# Altium PCB PCB1.PcbDoc
Units mm, origin at the board's own origin, x right, y up, seen from the top; angles counter-clockwise.
Board outline 129.67 x 121.92 mm, 2 copper layers (Top Layer, Bottom Layer); 42 components, 35 nets, 136 pads, 16 vias.
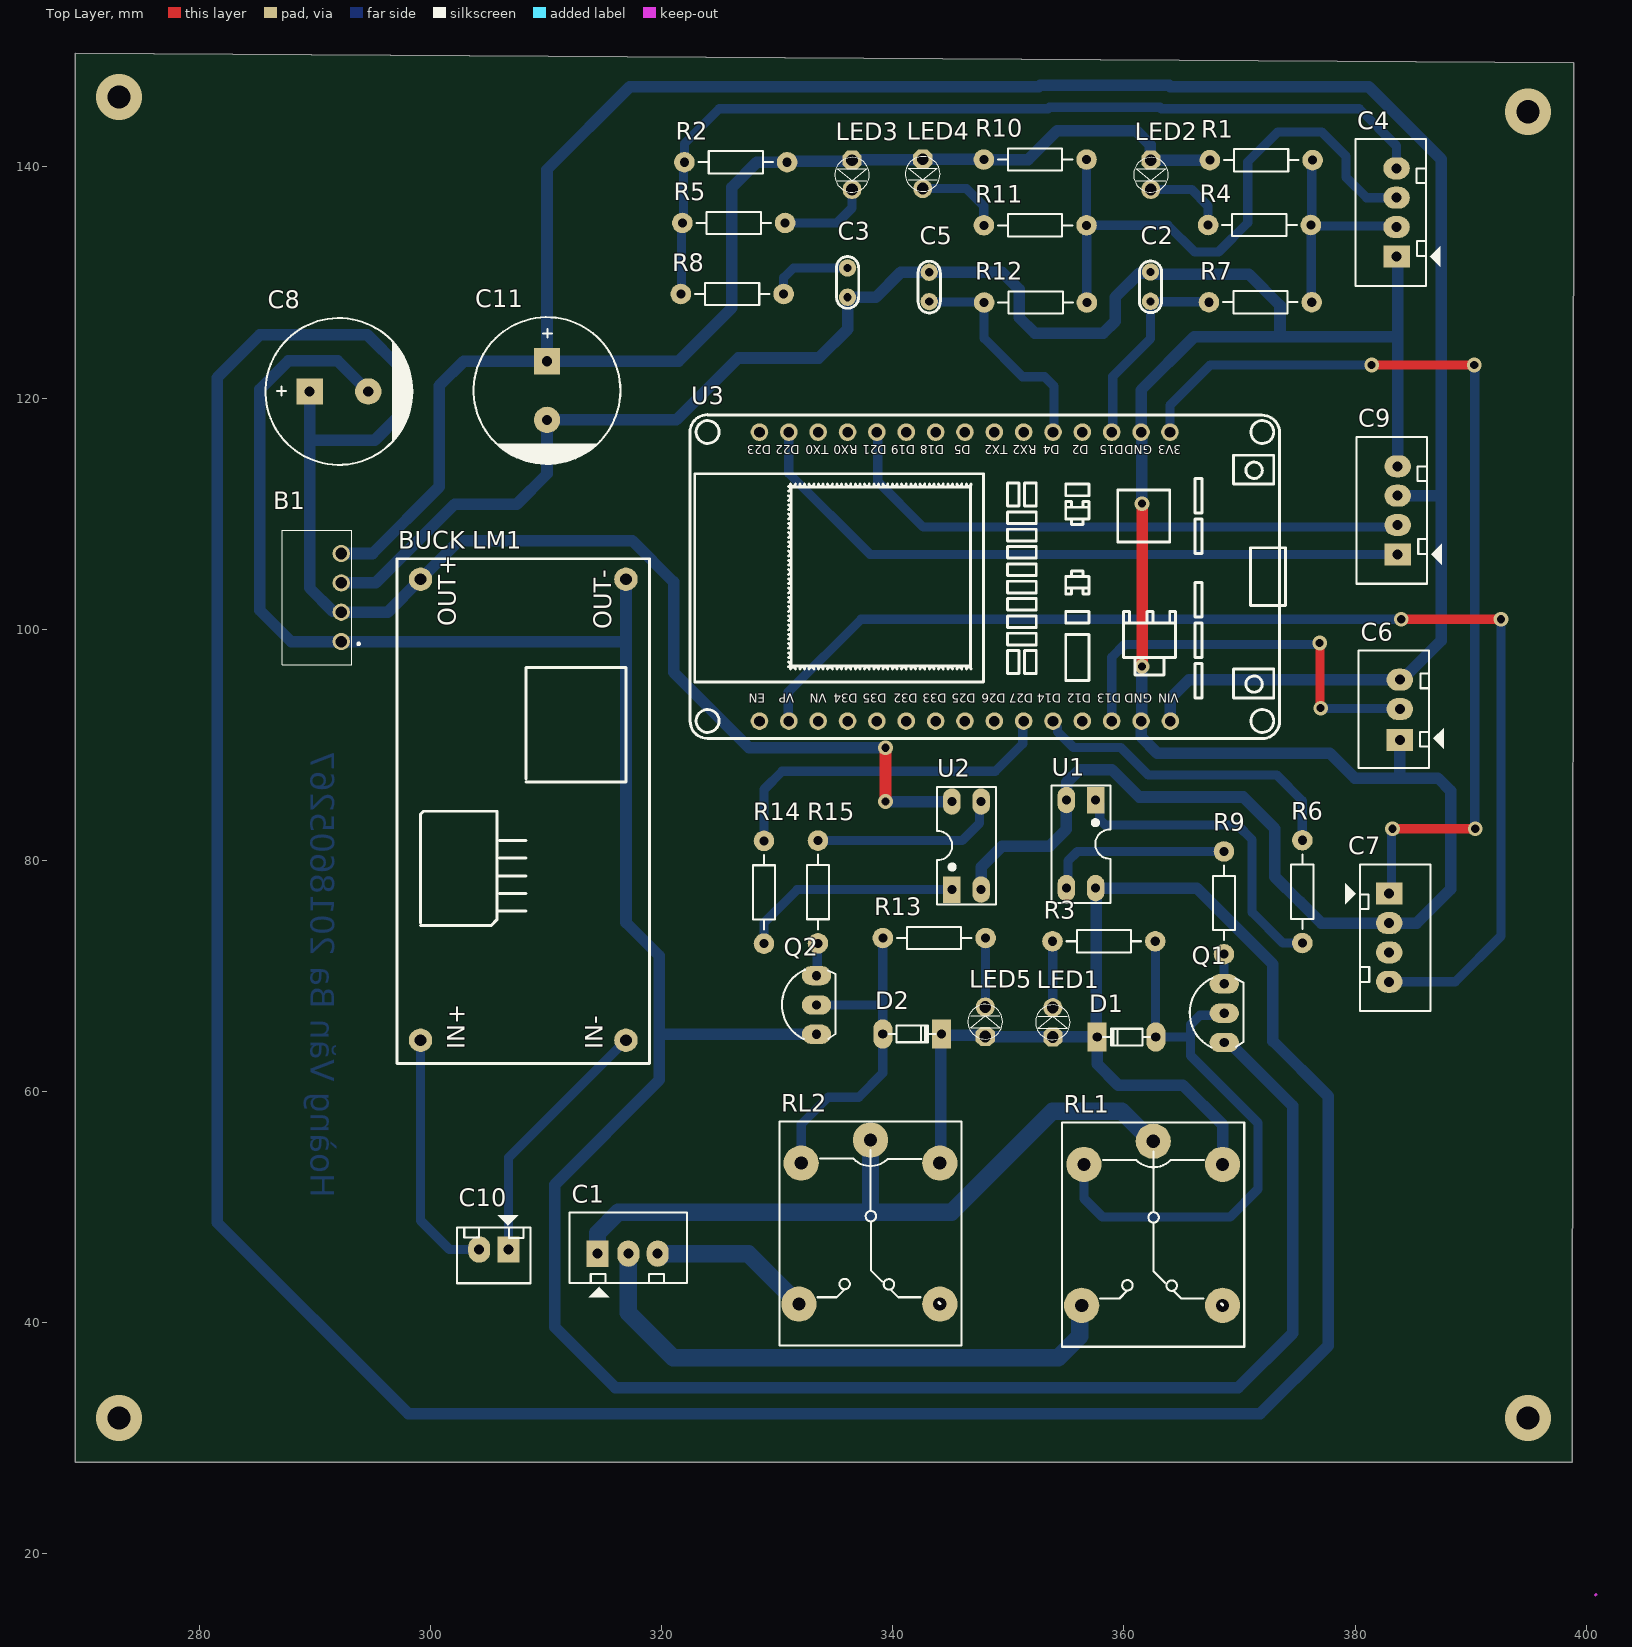
[diagram p0: Top Layer view]
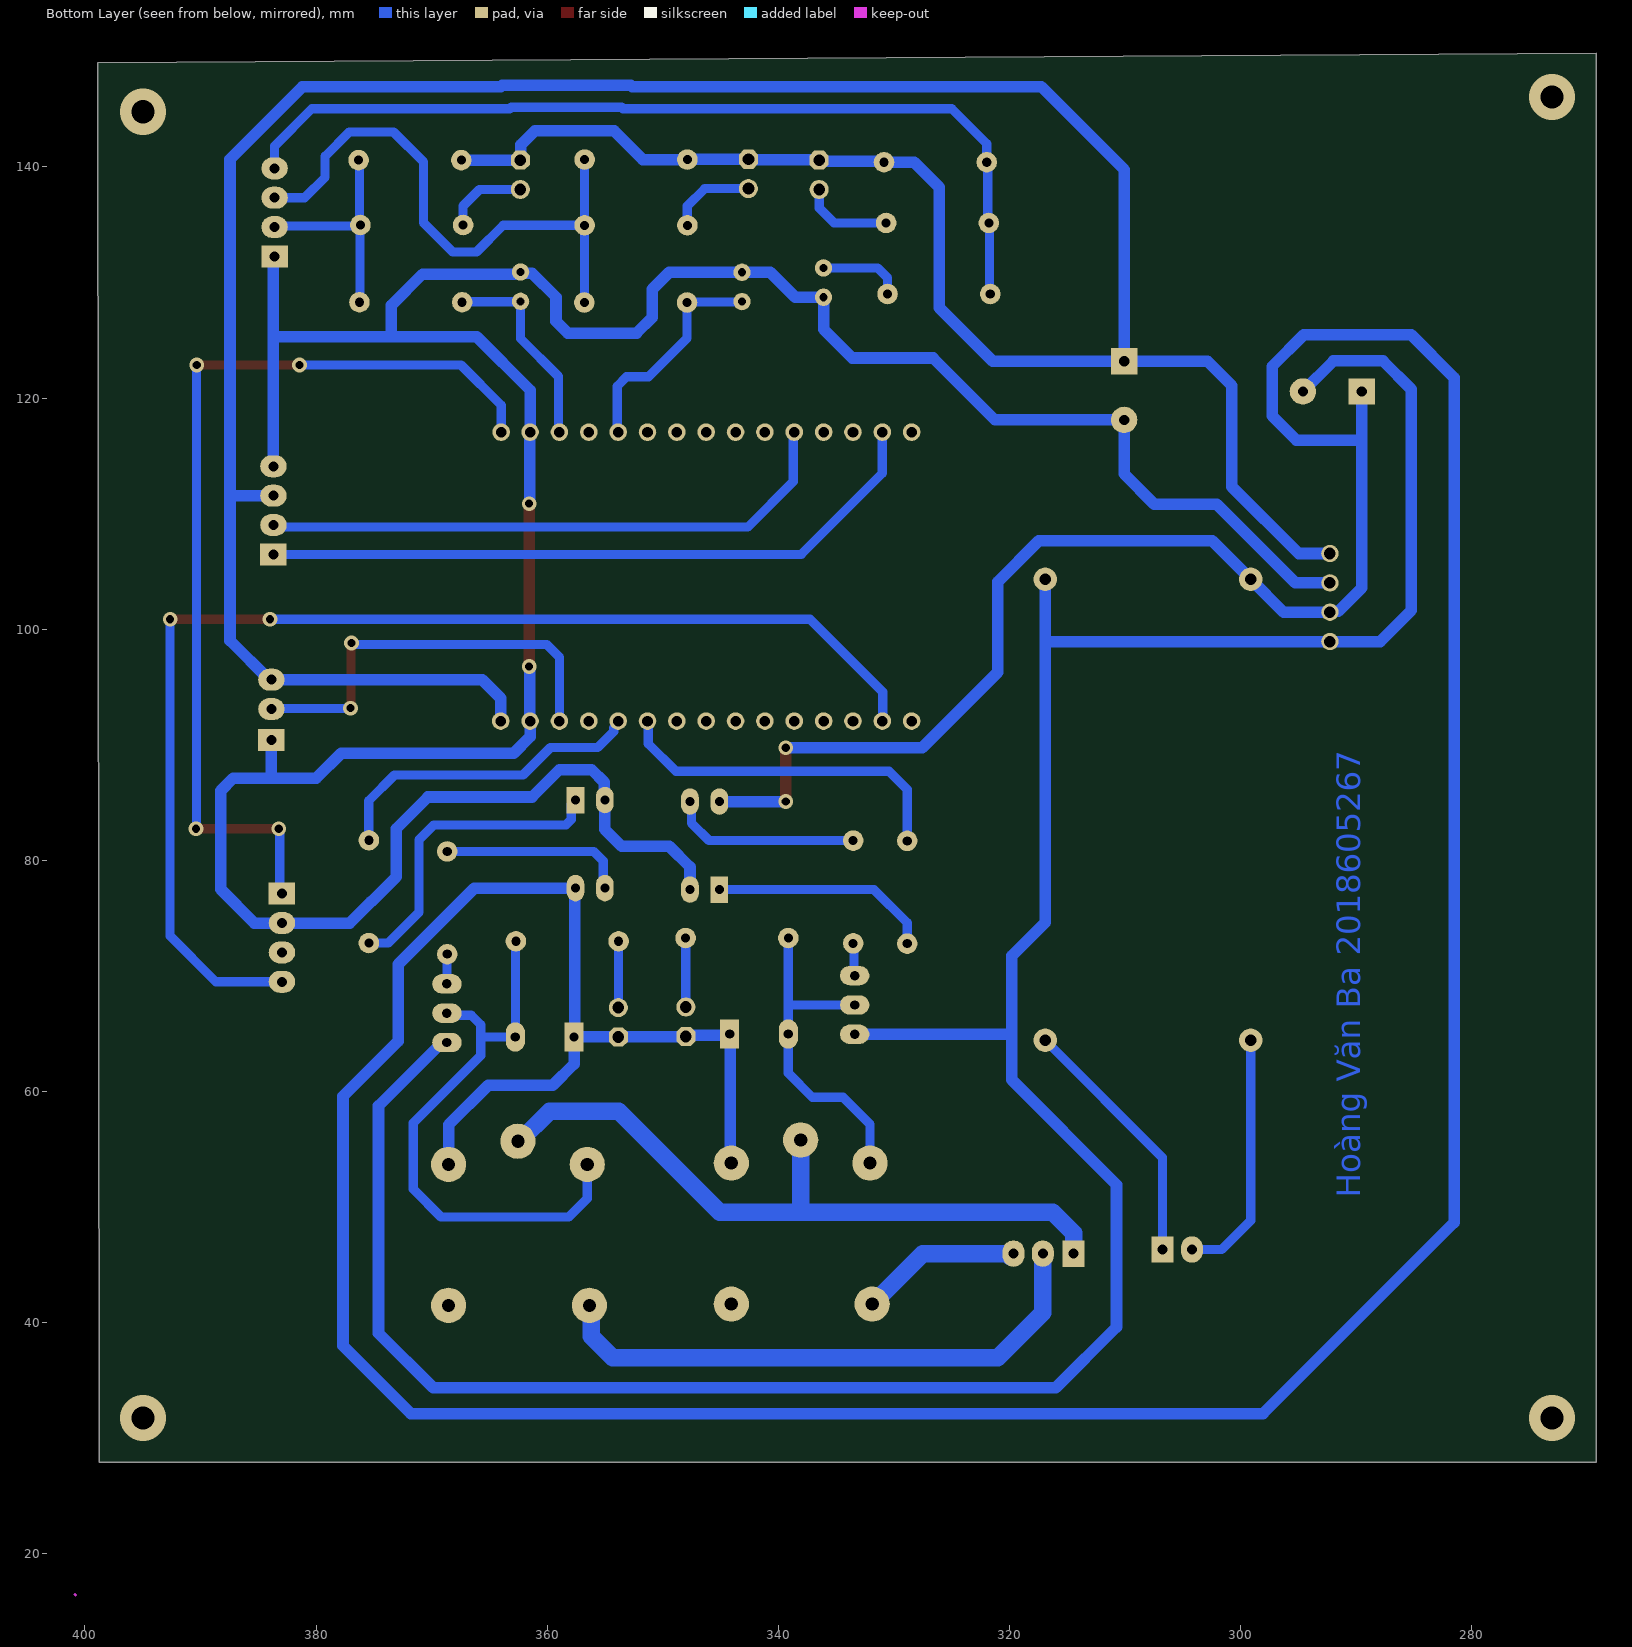
[diagram p1: Bottom Layer view, seen from below]
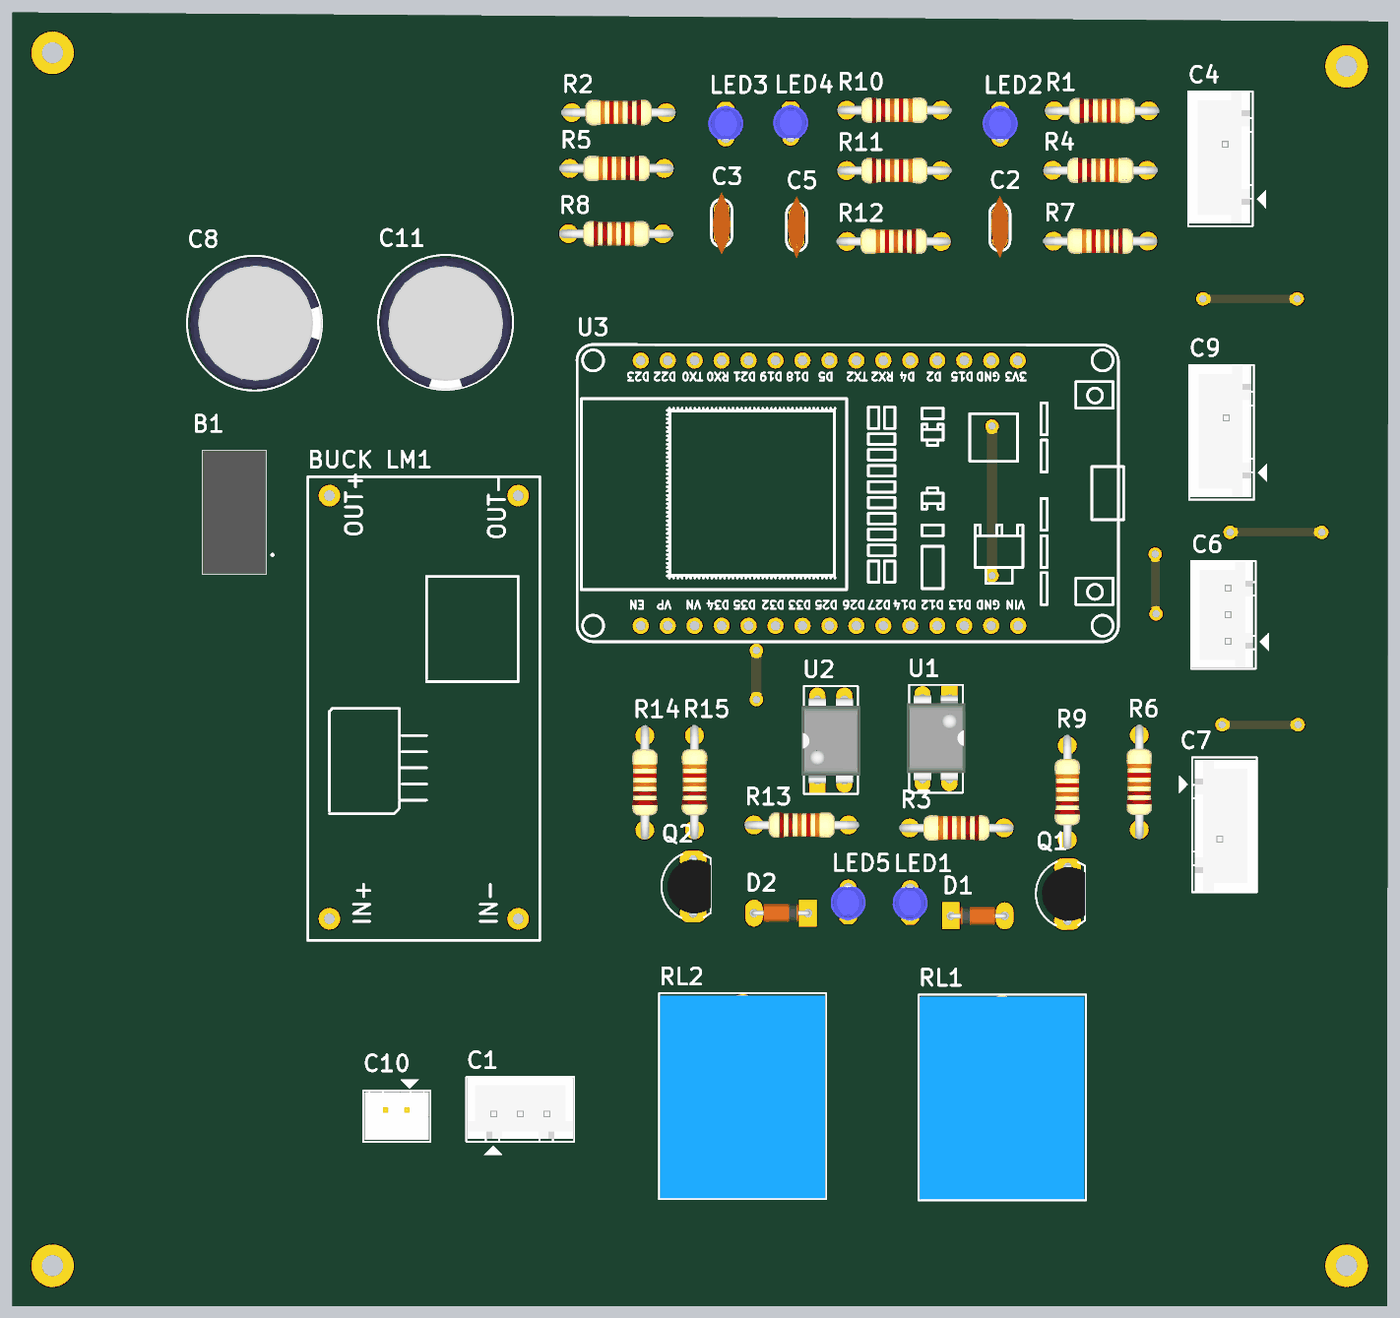
[diagram p2: 3D render of the assembled board from above, using the file's embedded part models]

## Layer stack, top to bottom
Top Solder: solder mask 0.0102, Solder Resist, Dk 3.5
Top Layer: signal copper 0.0356
Dielectric 1: dielectric 0.32, FR-4, Dk 4.8
Bottom Layer: signal copper 0.0356
Bottom Solder: solder mask 0.0102, Solder Resist, Dk 3.5

## Board outline
269.24,27.94 398.78,27.94 398.779,27.964 398.907,148.996 269.24,149.86

## Design rules (kind name [scope] priority, off if disabled: settings)
Clearance [All] p1: gap=1 ignorepadtopadclearanceinfootprint=FALSE
PolygonConnect [All] p1: connectstyle=Relief reliefconductorwidth=0.254 reliefentries=4 polygonreliefangle="90 Angle" airgapwidth=0.254
RoutingVias [All] p1: holewidth=0.711 width=1.27 viastyle="Through Hole" minholewidth=0.711 minwidth=1.27 maxholewidth=0.711 maxwidth=1.27
SolderMaskExpansion [All] p1: expansion=0.102 istentingtop=FALSE
Width GND_ISO [InNet('GND_ISO')] p1: maxlimit=1 minlimit=1 preferedwidth=1
Width COM_O_1 [InNet('COM_O_1')] p2: maxlimit=1.5 minlimit=1.5 preferedwidth=1.5
Width OUT_RL1 [InNet('OUT_RL1')] p3: maxlimit=1.5 minlimit=1.5 preferedwidth=1.5
Width OUT_RL2 [InNet('OUT_RL2')] p4: maxlimit=1.5 minlimit=1.5 preferedwidth=1.5
Width OUT_RL3 [InNet('OUT_RL3')] p5: maxlimit=1.5 minlimit=1.5 preferedwidth=1.5
Width VCC_ISO [InNet('VCC5_ISO')] p6: maxlimit=1 minlimit=1 preferedwidth=1
Width GND [InNet('GND')] p7: maxlimit=1 minlimit=1 preferedwidth=1
Width VCC [InNet('VCC5')] p8: maxlimit=1 minlimit=1 preferedwidth=1
Width SIGNAL [All] p9: maxlimit=0.8 minlimit=0.8 preferedwidth=0.8
30 further rules are at their usual default settings.

## Components (designator, comment, footprint, x,y, rotation, side; value= is the part's Value field where it differs from the comment)
B1 "B0505S1W" B0505S1W 292.278,98.933 r90 top
"BUCK LM1" "Buck LM2596" "BUCK LM2596" 307.264,83.998 r90 top
C1 "Header3" Header3 314.579,45.974 r0 top
C2 "104" "tu gom" 362.306,129.642 r90 top
C3 "104" "tu gom" 336.093,129.997 r270 top
C4 "Header4" Header4 383.591,132.258 r90 top
C5 "104" "tu gom" 343.154,129.616 r90 top
C6 "1_WIRE_2" Header3 383.87,90.551 r90 top
C7 "SS_HUMI" Header4 382.956,77.114 r270 top
C8 "Cap Pol3" CP2/5 289.535,120.574 r0 top value=C?
C9 "LCD_I2C" Header4 383.692,106.477 r90 top
C10 "Header2" Header2 306.756,46.33 r180 top
C11 "Cap Pol3" CP2/5 310.083,123.19 r270 top value=C?
D1 "100v" "DIODE 0.5A" 360.223,64.719 r0 top
D2 "100v" "DIODE 0.5A" 341.681,64.973 r180 top
LED1 "LED 3mm" LED-3MM-BLUE 353.847,66.116 r90 top
LED2 "LED 3mm" LED-3MM-BLUE 362.331,139.192 r270 top
LED3 "LED 3mm" LED-3MM-BLUE 336.474,139.192 r270 top
LED4 "LED 3mm" LED-3MM-BLUE 342.595,139.268 r270 top
LED5 "LED 3mm" LED-3MM-BLUE 348.005,66.167 r90 top
Q1 "C1815" C1815_cam 368.681,66.777 r90 top
Q2 "C1815" C1815_cam 333.4,67.488 r90 top
R1 "10K" R1/4W 376.326,140.589 r180 top value="R1/4W - 1K"
R2 "10K" R1/4W 321.97,140.411 r0 top value="R1/4W - 1K"
R3 "390R" R1/4W 353.822,73 r0 top value="R1/4W - 1K"
R4 "220R" R1/4W 376.174,134.976 r180 top value="R1/4W - 1K"
R5 "220R" R1/4W 321.793,135.153 r0 top value="R1/4W - 1K"
R6 "220R" R1/4W 375.437,81.737 r270 top value="R1/4W - 1K"
R7 "1K" R1/4W 367.36,128.295 r0 top value="R1/4W - 1K"
R8 "1K" R1/4W 330.556,129.007 r180 top value="R1/4W - 1K"
R9 "560R" R1/4W 368.656,80.772 r270 top value="R1/4W - 1K"
R10 "10K" R1/4W 356.768,140.64 r180 top value="R1/4W - 1K"
R11 "220R" R1/4W 356.768,134.95 r180 top value="R1/4W - 1K"
R12 "1K" R1/4W 347.904,128.27 r0 top value="R1/4W - 1K"
R13 "510R" R1/4W 348.031,73.279 r180 top value="R1/4W - 1K"
R14 "100R" R1/4W 328.854,81.686 r270 top value="R1/4W - 1K"
R15 "510R" R1/4W 333.527,81.712 r270 top value="R1/4W - 1K"
RL1 "Relay" RELAY_SRA_05VDC_SL_C 362.54,55.696 r270 top
RL2 "Relay" RELAY_SRA_05VDC_SL_C 338.074,55.804 r270 top
U1 "PC817" DIP4/W0.3 357.556,85.217 r180 top
U2 "PC817" DIP4/W0.3 345.11,77.47 r0 top
U3 "ESP32_MODULE copy" ESP32-WIFIMODULE-FOOTPRINT 347.98,106.68 r90 top

## Footprints (in the part's own frame and the unit in brackets; to place one, negate y for a bottom-side part, rotate by r counter-clockwise, add the part's x,y. Pads: shape width x height; smd on the part's side, far side on the other; paste and mask are expansions set on the pad)
B0505S1W [mm]
  round 1.5 hole 1: 1(0,0) 2(2.54,0) 3(5.08,0) 4(7.62,0)
  silkscreen extent -1.99,-1.6 9.61,5.1, body extent -1.99,-0.9 9.61,5.1, height 10.1
"BUCK LM2596" [mil]
  round 80 hole 40: 1(-770,320) 2(-770,-380) 3(800,-380) 4(800,320)
  silkscreen extent -850,-460 870,400
C1815_cam [mil]
  oval 66x100 hole 32: 1(-100,0) 2(0,0) 3(100,0)
  silkscreen extent -117,-65 120,118, body extent -109,-66 109,95, height 245
CP2/5 [mil]
  rect 90x90 hole 35: 1(0,0)
  round 90 hole 35: 2(200,0)
  silkscreen extent -150,-250 350,250, body extent -142,-246 350,246, height 984
"DIODE 0.5A" [mil] "Diode muoi, xung"
  oval 65x100 hole 32: 1(100,0)
  rect 65x100 hole 32: 2(-100,0)
  silkscreen extent -80,-30 80,28, body extent -108,-33 108,32, height 61
DIP4/W0.3 [mil]
  rect 60x90 hole 31: 1(0,0)
  oval 60x90 hole 31: 2(100,0) 3(100,300) 4(0,300)
  silkscreen extent -50,-50 150,350, body extent -59,-10 159,305, height 170
ESP32-WIFIMODULE-FOOTPRINT [mil]
  round 60 hole 36: 1(-575.9,768.25) 2(-575.9,668.25) 3(-575.9,568.25) 4(-575.9,468.25) 5(-575.9,368.25) 6(-575.9,268.25) 7(-575.9,168.25) 8(-575.9,68.25) 9(-575.9,-31.75) 10(-575.9,-131.75) 11(-575.9,-231.75) 12(-575.9,-331.75) 13(-575.9,-431.75) 14(-575.9,-531.75) 15(-575.9,-631.75) 16(408.35,-630.18) 17(408.35,-531.75) 18(408.35,-431.75) 19(408.35,-331.75) 20(408.35,-231.75) 21(408.35,-131.75) 22(408.35,-31.75) 23(408.35,68.25) 24(408.35,168.25) 25(408.35,268.25) 26(408.35,368.25) 27(408.35,468.25) 28(408.35,568.25) 29(408.35,668.25) 30(408.35,768.25)
  silkscreen extent -635,-1023 468,1005
Header2 [mil] "CON2"
  rect 75x90 hole 34: 1(0,0)
  oval 75x90 hole 34: 2(100,0)
  silkscreen extent -75,-118 175,115, body extent -68,-70 168,107, height 236
Header3 [mil] "CON 3"
  rect 75x90 hole 34: 1(-5,0)
  oval 75x90 hole 34: 2(100,0) 3(200,0)
  silkscreen extent -100,-150 300,140, body extent -95,-90 295,136, height 276
Header4 [mil] "CON4"
  rect 75x90 hole 34: 1(0,0)
  oval 75x90 hole 34: 2(100,0) 3(200,0) 4(300,0)
  silkscreen extent -100,-150 400,140, body extent -90,-90 398,136, height 276
LED-3MM-BLUE [mil]
  oct 65x65 hole 40: 1(-55,0)
  round 65 hole 40: 2(45,0)
  silkscreen extent -64,-59 54,59, body extent -72,-65 54,65, height 184
R1/4W [mil]
  round 70 hole 31: 1(0,0) 2(350,0)
  silkscreen extent 48,-38 302,38, body extent -40,-47 386,47, height 111
RELAY_SRA_05VDC_SL_C [mil] "Relay SPDT, 5 pin, 10A,W 650mil, L 800mil, H 800mil"
  round 120 hole 45: 1(559.06,-243.78) 2(559.06,236.22) 3(78.74,236.22) 4(0,0) 5(78.74,-236.22)
  silkscreen extent -63,-311 700,310, body extent -55,-306 697,304, height 602
"tu gom" [mm] "Tu gom mini"
  round 1.5 hole 0.7: 1(-1.27,0) 2(1.27,0)
  silkscreen extent -2.25,-0.97 2.22,0.97, body extent -2.92,-0.85 2.92,0.85, height 6.12

## Part data
B1: "Power Supply", Manufacturer_Name=Mornsun, Manufacturer_Part_Number=B0505S-1W, Datasheet Link=https://www.mornsun-power.com/uploads/pdf/B_D-1W.pdf, Height=10.41mm
C1: "Header IDC, 3 x 1 Pin Vertical 2.54mm Pitch (Non-Boxed, Male)", Manufacturer="W¨¹rth Elektronik eiSos GmbH", partNo=613002143121, ComponentLink1 Description=Manufacturer, ComponentLink1URL=http://www.we-online.com, ComponentLink2 Description=Datasheet, ComponentLink2URL=http://katalog.we-online.de/em/datasheet/6130xx143121.pdf, Created by="Karrer Zheng", Created Date="29 March 2013", NoPins=02
C2 C3 C5: library part "Tu gom 104 50V", "Cắm", Chung_Loai=Cắm, Don_Vi=Con, Ma_Hang=MH004761, So_Chan=2, Ten_Linh_Kien="Tụ gốm 104 100nF 50V"
C4: "Header IDC, 4 x 1 Pin Vertical 2.54mm Pitch (Non-Boxed, Male)", Manufacturer="W¨¹rth Elektronik eiSos GmbH", partNo=613002143121, ComponentLink1 Description=Manufacturer, ComponentLink1URL=http://www.we-online.com, ComponentLink2 Description=Datasheet, ComponentLink2URL=http://katalog.we-online.de/em/datasheet/6130xx143121.pdf, Created by="Karrer Zheng", Created Date="29 March 2013", NoPins=02
C6: library part Header3, "Header IDC, 3 x 1 Pin Vertical 2.54mm Pitch (Non-Boxed, Male)", Manufacturer="W¨¹rth Elektronik eiSos GmbH", partNo=613002143121, ComponentLink1 Description=Manufacturer, ComponentLink1URL=http://www.we-online.com, ComponentLink2 Description=Datasheet, ComponentLink2URL=http://katalog.we-online.de/em/datasheet/6130xx143121.pdf, Created by="Karrer Zheng", Created Date="29 March 2013", NoPins=02
C7 C9: library part Header4, "Header IDC, 4 x 1 Pin Vertical 2.54mm Pitch (Non-Boxed, Male)", Manufacturer="W¨¹rth Elektronik eiSos GmbH", partNo=613002143121, ComponentLink1 Description=Manufacturer, ComponentLink1URL=http://www.we-online.com, ComponentLink2 Description=Datasheet, ComponentLink2URL=http://katalog.we-online.de/em/datasheet/6130xx143121.pdf, Created by="Karrer Zheng", Created Date="29 March 2013", NoPins=02
C8 C11: "Polarized Capacitor (Surface Mount)", LatestRevisionDate=17-Jul-2002, LatestRevisionNote="Re-released for DXP Platform.", PackageReference=C0805, Publisher="Altium Limited"
C10: "Header IDC, 2 x 1 Pin Vertical 2.54mm Pitch (Non-Boxed, Male)", Manufacturer="W¨¹rth Elektronik eiSos GmbH", partNo=613002143121, ComponentLink1 Description=Manufacturer, ComponentLink1URL=http://www.we-online.com, ComponentLink2 Description=Datasheet, ComponentLink2URL=http://katalog.we-online.de/em/datasheet/6130xx143121.pdf, Created by="Karrer Zheng", Created Date="29 March 2013", NoPins=02
D1 D2: library part "Diode 1N4148", "Cắm", Chung_Loai=Cắm, Don_Vi=Con, Ma_Hang=MH001065, Ten_Linh_Kien="Diode 1N4148 DO35 450mA 100V ( 1N4148 DIP)"
LED1 LED2 LED3 LED4 LED5: library part "LED 3mm Xanh Duong", "Cắm", Chung_Loai=Cắm, Don_Vi=Con, Ma_Hang=MH009003, Ten_Linh_Kien="LED 3MM Xanh Dương SS (1000c)"
Q1 Q2: "NPN 600mW, ECB"
R1 R2 R3 R4 R5 R6 R7 R8 R9 R10 R11 R12 R13 R14 R15: library part R1/4W, "Resistor 1/4W"
RL1 RL2: library part RL_SRA-05VDC-SL-C, "Relay 5 Chan", Ma_Hang=MH009374, Ten="Relay 5V10A SRD-05VDC-SL-C Chính Hãng"
U1 U2: "Single Opto"

## Via types
v1: diameter 1.27, hole 0.711, Top Layer to Bottom Layer, 12 vias
v2: diameter 4, hole 2, Top Layer to Bottom Layer, 4 vias

## Nets (pads, with @x,y where several pads share a name; then routed paths per layer and width w, separated by ;. In a path a pad name is that pad's centre, name@x,y a point inside that pad or via, vN(x,y) a via of type N, cw(c..) or ccw(c..) an arc to the next point about the centre after c; other vN are vias at no path point)
1_WIRE_1: C6.2 U3.13 | length 36.6
  Top Layer w0.8: v1(376.936,98.806) 376.977,98.765 376.977,93.215 v1(377.019,93.174)
  Bottom Layer w0.8: U3.13 358.946,97.58 360.045,98.679 376.477,98.679 376.514,98.716 376.846,98.716 v1(376.936,98.806) ; v1(377.019,93.174) 377.06,93.132 383.829,93.132 C6.2
COM_O_1: C1.1 RL1.4 RL2.4 | length 61.6
  Bottom Layer w1.5: C1.1 314.452,47.752 316.255,49.555 338.074,49.555 ; RL2.4 338.074,49.555 ; RL1.4 362.397,55.696 359.8,58.293 353.822,58.293 345.084,49.555 338.074,49.555
GND: "BUCK LM1.3" B1.1 C8.2 Q1.1 Q2.1 | length 242.6
  Bottom Layer w1: C8.2 291.972,123.217 287.682,123.217 285.242,120.777 285.242,101.625 287.934,98.933 B1.1 316.89,98.933 316.916,98.908 ; 316.916,104.318 316.916,98.908 ; Q2.1 320.04,64.948 319.811,64.719 ; Q1.1 369.113,64.237 374.599,58.75 374.599,39.091 369.875,34.366 316.001,34.366 310.744,39.624 310.744,51.943 319.811,61.011 319.811,64.719 ; 316.916,98.908 316.916,74.625 319.811,71.73 319.811,64.719
GND_ISO: B1.3 C2.2 C3.2 C4.1 C5.2 C6.1 C7.2 C9.4 C11.2 U1.2 U2.2 U3.14 U3.17 | length 278.3
  Top Layer w1: v1(361.569,96.774) v1(361.569,110.871)
  Bottom Layer w1: B1.3 295.273,104.013 302.08,110.82 307.467,110.82 310.083,113.436 C11.2 321.259,118.11 326.619,123.469 333.604,123.469 336.093,125.959 C3.2 338.544,128.727 340.703,130.886 C5.2 349.453,130.886 350.926,129.413 350.926,126.975 352.273,125.628 358.216,125.628 359.245,126.657 359.245,128.74 361.321,130.816 362.21,130.816 C2.2 362.401,130.816 362.755,130.816 362.837,130.734 370.789,130.734 373.507,128.016 373.507,125.298 ; U2.2 347.65,79.426 349.453,81.229 353.568,81.229 355.016,82.677 U1.2 355.016,85.789 355.067,85.84 355.067,86.754 356.172,87.86 358.939,87.86 361.318,85.481 370.322,85.481 373.048,82.755 373.048,78.589 375.233,76.404 375.259,76.404 377.089,74.574 C7.2 385.349,74.574 388.264,77.49 388.264,86.03 387.172,87.122 384.048,87.122 ; v1(361.569,96.774) 361.528,96.733 361.528,92.093 U3.14 361.486,90.687 362.892,89.281 377.825,89.281 379.984,87.122 384.048,87.122 ; v1(361.569,110.871) 361.528,110.912 361.528,117.011 U3.17 361.486,120.694 366.09,125.298 373.507,125.298 ; C4.1 383.692,132.156 383.692,125.171 ; C9.4 383.692,125.171 ; C6.1 383.87,87.3 384.048,87.122 ; 373.507,125.298 383.565,125.298 383.692,125.171
IN_1: C2.1 R7.1 U3.18 | length 17.8
  Bottom Layer w0.8: U3.18 359.029,117.135 359.029,121.869 362.306,125.146 C2.1 362.344,128.333 367.322,128.333 R7.1
IN_2: C5.1 R12.1 U3.20 | length 19.7
  Bottom Layer w0.8: C5.1 343.192,128.308 347.866,128.308 R12.1 347.904,125.171 351.231,121.844 353.136,121.844 353.949,121.031 353.949,117.135 U3.20
IN_3: C3.1 R8.1 | length 7.3
  Bottom Layer w0.8: R8.1 330.556,130.404 331.419,131.267 C3.1
"NetBUCK LM1_2": "BUCK LM1.2" C10.1 | length 22.3
  Bottom Layer w0.8: C10.1 306.756,54.28 316.916,64.44
NetD1_1: D1.1 Q1.2 R3.2 RL1.5 | length 51
  Bottom Layer w0.8: RL1.5 356.54,50.749 358.14,49.149 369.189,49.149 371.602,51.562 371.602,57.277 365.76,63.119 365.76,64.77 ; R3.2 362.737,72.974 362.737,64.745 D1.1 365.709,64.719 365.76,64.77 ; Q1.2 368.513,66.609 366.583,66.609 365.76,65.786 365.76,64.77
NetD2_1: D2.1 Q2.2 R13.2 RL2.5 | length 29.7
  Bottom Layer w0.8: RL2.5 332.074,57.17 334.416,59.512 337.058,59.512 339.141,61.595 D2.1 339.141,67.386 ; Q2.2 339.039,67.488 339.141,67.386 ; R13.2 339.141,67.386
NetLED1_2: LED1.2 R3.1 | length 5.8
  Bottom Layer w0.8: R3.1 353.835,72.987 353.835,67.272 LED1.2
NetLED2_2: LED2.2 R4.2 | length 7.2
  Bottom Layer w0.8: LED2.2 365.862,138.049 367.284,136.627 R4.2
NetLED3_2: LED3.2 R5.2 | length 7.9
  Bottom Layer w0.8: R5.2 335.178,135.153 336.474,136.449 LED3.2
NetLED4_2: LED4.2 R11.2 | length 7.6
  Bottom Layer w0.8: LED4.2 346.38,138.125 347.878,136.627 R11.2
NetLED5_2: LED5.2 R13.1 | length 6
  Bottom Layer w0.8: LED5.2 348.018,67.323 348.018,73.266 R13.1
NetQ1_3: Q1.3 R9.2 | length 2.6
  Bottom Layer w0.8: R9.2 368.668,71.869 368.668,69.329 Q1.3
NetQ2_3: Q2.3 R15.2 | length 2.8
  Bottom Layer w0.8: Q2.3 333.464,70.091 333.464,72.758 R15.2
NetR6_2: R6.2 U1.1 | length 27.5
  Bottom Layer w0.8: U1.1 357.918,84.855 357.918,83.53 358.386,83.061 369.821,83.061 371.094,81.788 371.094,75.509 373.756,72.847 R6.2
NetR9_1: R9.1 U1.3 | length 16.2
  Bottom Layer w0.8: U1.3 355.154,77.736 355.154,79.945 355.981,80.772 R9.1
NetR14_2: R14.2 U2.1 | length 19.2
  Bottom Layer w0.8: R14.2 328.854,74.6 331.724,77.47 U2.1
NetR15_1: R15.1 U2.3 | length 16.5
  Bottom Layer w0.8: R15.1 345.999,81.712 347.511,83.224 347.511,84.951 U2.3
OUT_1: R6.1 U3.11 | length 28.2
  Bottom Layer w0.8: U3.11 353.866,91.856 354.244,91.478 354.244,91.156 355.641,89.76 359.726,89.76 362.105,87.381 373.223,87.381 375.437,85.166 R6.1
OUT_2: R14.1 U3.10 | length 30.5
  Bottom Layer w0.8: R14.1 328.854,86.131 330.426,87.703 348.866,87.703 351.253,90.09 351.253,91.978 U3.10
OUT_BTN_1: C4.2 R1.1 R4.1 R7.2 | length 19.8
  Bottom Layer w0.8: R7.2 376.212,128.333 R4.1@376.212,134.938 ; R1.1 376.25,140.513 376.25,135.052 R4.1 R4.1@376.212,134.938 ; C4.2 383.502,134.887 376.263,134.887 R4.1@376.212,134.938
OUT_BTN_2: C4.3 R10.1 R11.1 R12.2 | length 51
  Bottom Layer w0.8: R10.1 R11.1 ; R12.2 356.781,128.283 356.781,134.938 R11.1 ; C4.3 381,137.338 379.222,139.116 379.222,140.931 377.125,143.027 373.304,143.027 370.713,140.437 370.713,135.167 368.179,132.634 366.121,132.634 363.804,134.95 R11.1
OUT_BTN_3: C4.4 R2.1 R5.1 R8.2 | length 79.4
  Bottom Layer w0.8: R8.2 321.729,129.07 321.729,135.09 R5.1 321.881,135.242 321.881,140.322 R2.1 321.97,142.011 324.993,145.034 353.436,145.034 353.558,145.156 363.118,145.156 363.24,145.034 380.365,145.034 383.591,141.808 C4.4
OUT_RL1: C1.2 RL1.1 | length 49.3
  Bottom Layer w1.5: C1.2 317.119,40.843 321.005,36.957 354.33,36.957 356.186,38.813 356.186,41.333 RL1.1
OUT_RL2: C1.3 RL2.1 | length 14.5
  Bottom Layer w1.5: C1.3@319.927,45.706 319.846,45.706 319.659,45.893 C1.3 327.512,45.974 RL2.1
SCL: C9.1 U3.29 | length 59.2
  Bottom Layer w0.8: U3.29 331.006,113.494 338.023,106.477 C9.1
SDA: C9.2 U3.26 | length 51
  Bottom Layer w0.8: U3.26 338.709,116.97 338.709,112.776 342.649,108.836 383.512,108.836 C9.2
SS_HUMI: C7.4 U3.2 | length 105.5
  Top Layer w0.8: v1(383.997,100.863) v1(392.633,100.863)
  Bottom Layer w0.8: U3.2 330.962,92.097 330.962,94.564 337.261,100.863 v1(383.997,100.863) ; C7.4 388.671,69.494 392.633,73.457 v1(392.633,100.863)
VCC5: "BUCK LM1.4" B1.2 C8.1 D1.2 D2.2 LED1.1 LED5.1 RL1.3 RL2.3 U1.4 U2.4 | length 412.1
  Top Layer w1: v1(339.369,85.09) v1(339.369,89.738)
  Bottom Layer w1: C8.1 289.535,116.357 ; v1(339.369,85.09) U2.4 ; v1(339.369,89.738) 327.558,89.738 321.031,96.266 321.031,104.089 317.475,107.645 302.463,107.645 299.136,104.318 296.291,101.473 B1.2 292.182,101.569 291.54,101.569 289.535,103.574 289.535,116.357 ; RL2.3 344.147,53.877 344.147,64.9 D2.2 344.322,64.872 347.904,64.872 LED5.1 348.031,64.745 353.822,64.745 LED1.1 D1.2 ; RL1.3 368.54,57.113 365.11,60.543 359.522,60.543 357.683,62.382 D1.2 ; 289.535,116.357 295.173,116.357 297.282,118.466 297.282,122.733 294.538,125.476 285.242,125.476 281.534,121.768 281.534,48.666 298.069,32.131 371.805,32.131 377.673,37.998 377.673,59.588 372.897,64.364 372.897,71.019 366.319,77.597 U1.4 357.619,77.534 357.619,64.783 D1.2
VCC5_ISO: B1.4 C6.3 C9.3 C11.1 LED2.1 LED3.1 LED4.1 R1.2 R2.2 R10.2 U3.15 | length 275.7
  Bottom Layer w1: B1.4 294.984,106.553 300.761,112.33 300.761,121.082 302.87,123.19 C11.1 ; U3.15 364.026,94.024 365.633,95.631 C6.3 ; R1.2 LED2.1 362.286,140.634 362.286,141.904 361.061,143.129 354.218,143.129 351.729,140.64 R10.2 347.866,140.653 342.608,140.653 LED4.1 342.557,140.627 336.512,140.627 LED3.1 336.385,140.5 330.949,140.5 R2.2 328.244,140.411 326.085,138.252 326.085,127.813 321.462,123.19 C11.1 ; C9.3 387.426,111.557 387.452,111.582 ; C6.3@384.061,95.631 387.452,99.022 387.452,111.582 ; C11.1 310.083,139.776 317.241,146.934 352.649,146.934 352.771,147.056 363.905,147.056 364.027,146.934 381.181,146.934 387.452,140.664 387.452,111.582
VCC12: "BUCK LM1.1" C10.2 | length 21.7
  Bottom Layer w0.8: 299.136,64.44 299.136,48.844 301.65,46.33 C10.2
VCC33_ISO: C7.1 U3.16 | length 83.2
  Top Layer w0.8: v1(381.432,122.86) v1(390.322,122.86) ; v1(383.235,82.728) v1(390.399,82.728)
  Bottom Layer w0.8: U3.16 363.987,119.385 367.462,122.86 v1(381.432,122.86) ; C7.1 383.145,77.304 383.145,82.638 v1(383.235,82.728) ; v1(390.322,122.86) 390.361,122.821 390.361,82.767 v1(390.399,82.728) v1@390.399,82.65
pads on no net: C7.3 RL1.2 RL2.2 U3.1 U3.3 U3.4 U3.5 U3.6 U3.7 U3.8 U3.9 U3.12 U3.19 U3.21 U3.22 U3.23 U3.24 U3.25 U3.27 U3.28 U3.30
copper on no net: | length 0.2
  Top Layer w0.8: 356.406,92.052 356.47,92.116
  Bottom Layer w0.8: 356.406,92.052 356.457,92.103
  other v2: 273.05,31.75 394.97,31.75 394.97,144.78 273.05,146.05

## Keep-outs
Keep-Out Layer:
  lines w0.254: 400.812,16.434 400.863,16.485

## Other copper
Bottom Layer:
  text "Hoàng Văn Ba 2018605267" at 288.951,50.8 h3.5 r270

## Text inside footprints (layer, text, board x,y; h text height)
"BUCK LM1": Top Overlay "IN+" at 302.946,63.678 h1.52 r90; Top Overlay "IN-" at 314.884,63.678 h1.52 r90; Top Overlay "OUT+" at 302.184,100.254 h1.52 r90; Top Overlay "OUT-" at 315.646,100 h1.52 r90
U3: Top Overlay "D23" at 329.466,115.927 h0.75 r180; Top Overlay "D22" at 331.967,115.927 h0.75 r180; Top Overlay "TX0" at 334.466,115.927 h0.75 r180; Top Overlay "RX0" at 336.967,115.927 h0.75 r180; Top Overlay "D21" at 339.466,115.927 h0.75 r180; Top Overlay "D19" at 341.967,115.927 h0.75 r180; Top Overlay "D18" at 344.467,115.927 h0.75 r180; Top Overlay "D5" at 346.767,115.927 h0.75 r180; Top Overlay "TX2" at 349.966,115.927 h0.75 r180; Top Overlay "RX2" at 352.467,115.927 h0.75 r180; Top Overlay "D4" at 354.467,115.927 h0.75 r180; Top Overlay "D2" at 356.966,115.927 h0.75 r180; Top Overlay "D15" at 359.966,115.927 h0.75 r180; Top Overlay "GND" at 362.467,115.927 h0.75 r180; Top Overlay "3V3" at 364.966,115.927 h0.75 r180; Top Overlay "EN" at 328.967,94.427 h0.75 r180; Top Overlay "VP" at 331.466,94.427 h0.75 r180; Top Overlay "VN" at 334.267,94.427 h0.75 r180; Top Overlay "D34" at 336.967,94.427 h0.75 r180; Top Overlay "D35" at 339.466,94.427 h0.75 r180; Top Overlay "D32" at 342.166,94.427 h0.75 r180; Top Overlay "D33" at 344.667,94.427 h0.75 r180; Top Overlay "D25" at 347.166,94.427 h0.75 r180; Top Overlay "D26" at 349.767,94.427 h0.75 r180; Top Overlay "D27" at 352.166,94.427 h0.75 r180; Top Overlay "D14" at 354.566,94.427 h0.75 r180; Top Overlay "D12" at 357.167,94.427 h0.75 r180; Top Overlay "D13" at 359.767,94.427 h0.75 r180; Top Overlay "GND" at 362.467,94.427 h0.75 r180; Top Overlay "VIN" at 364.767,94.427 h0.75 r180